# EAGLE board vcf (EAGLE 7.2.0)
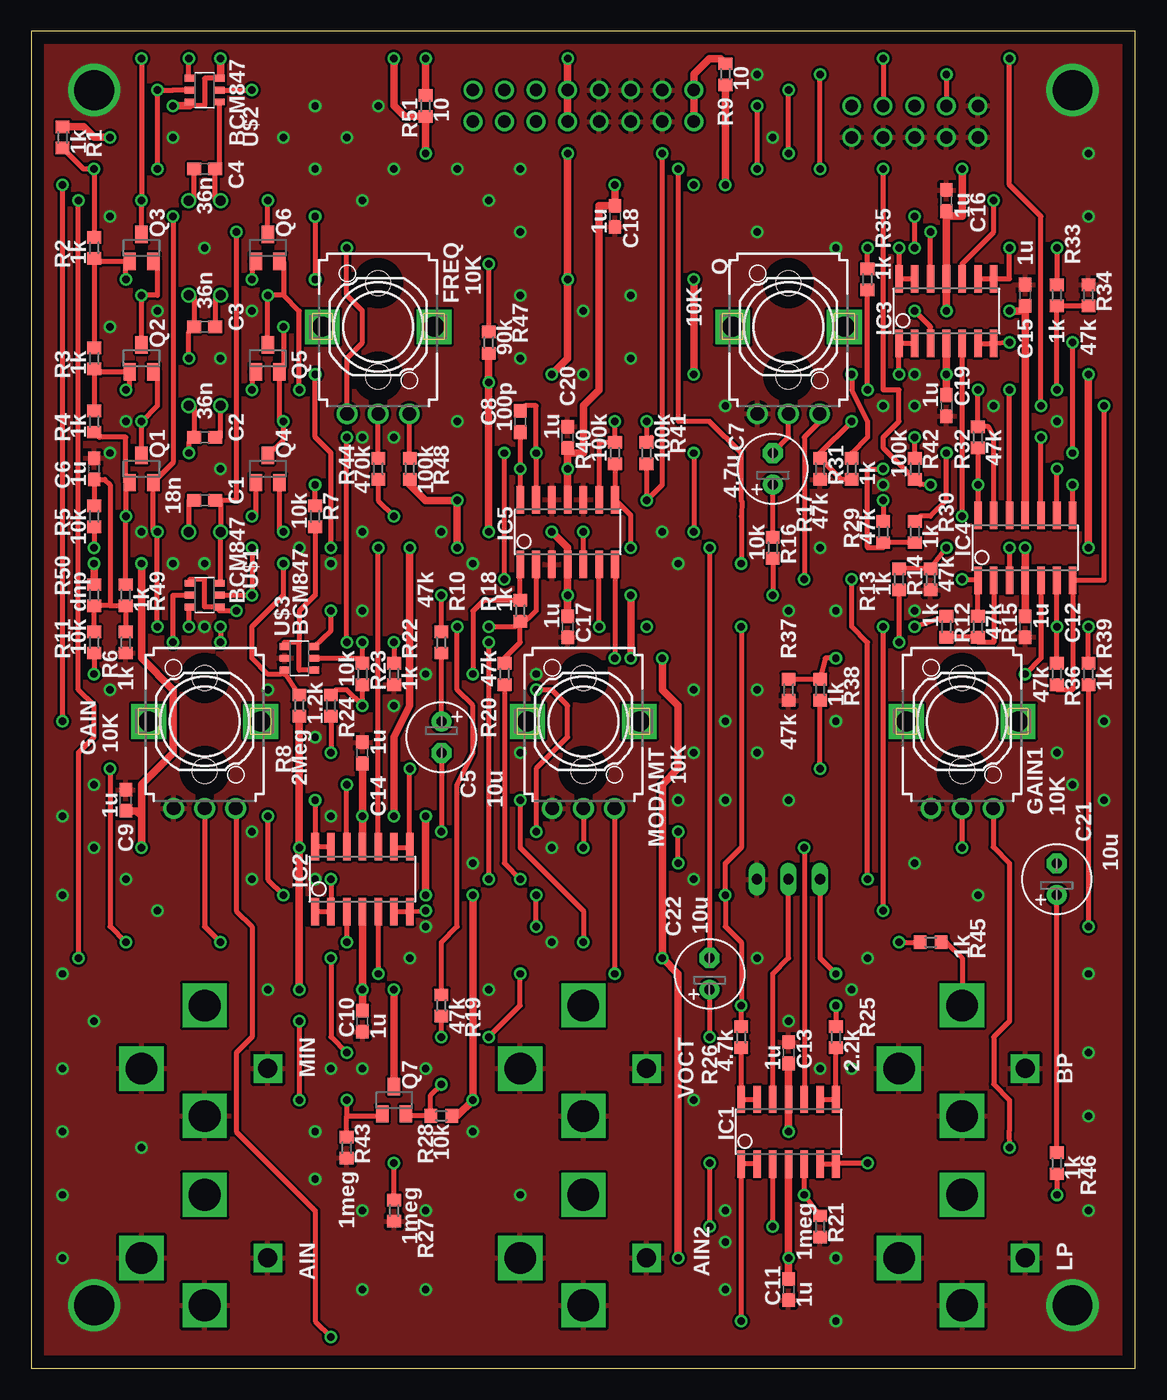
[diagram p0: board, top side]
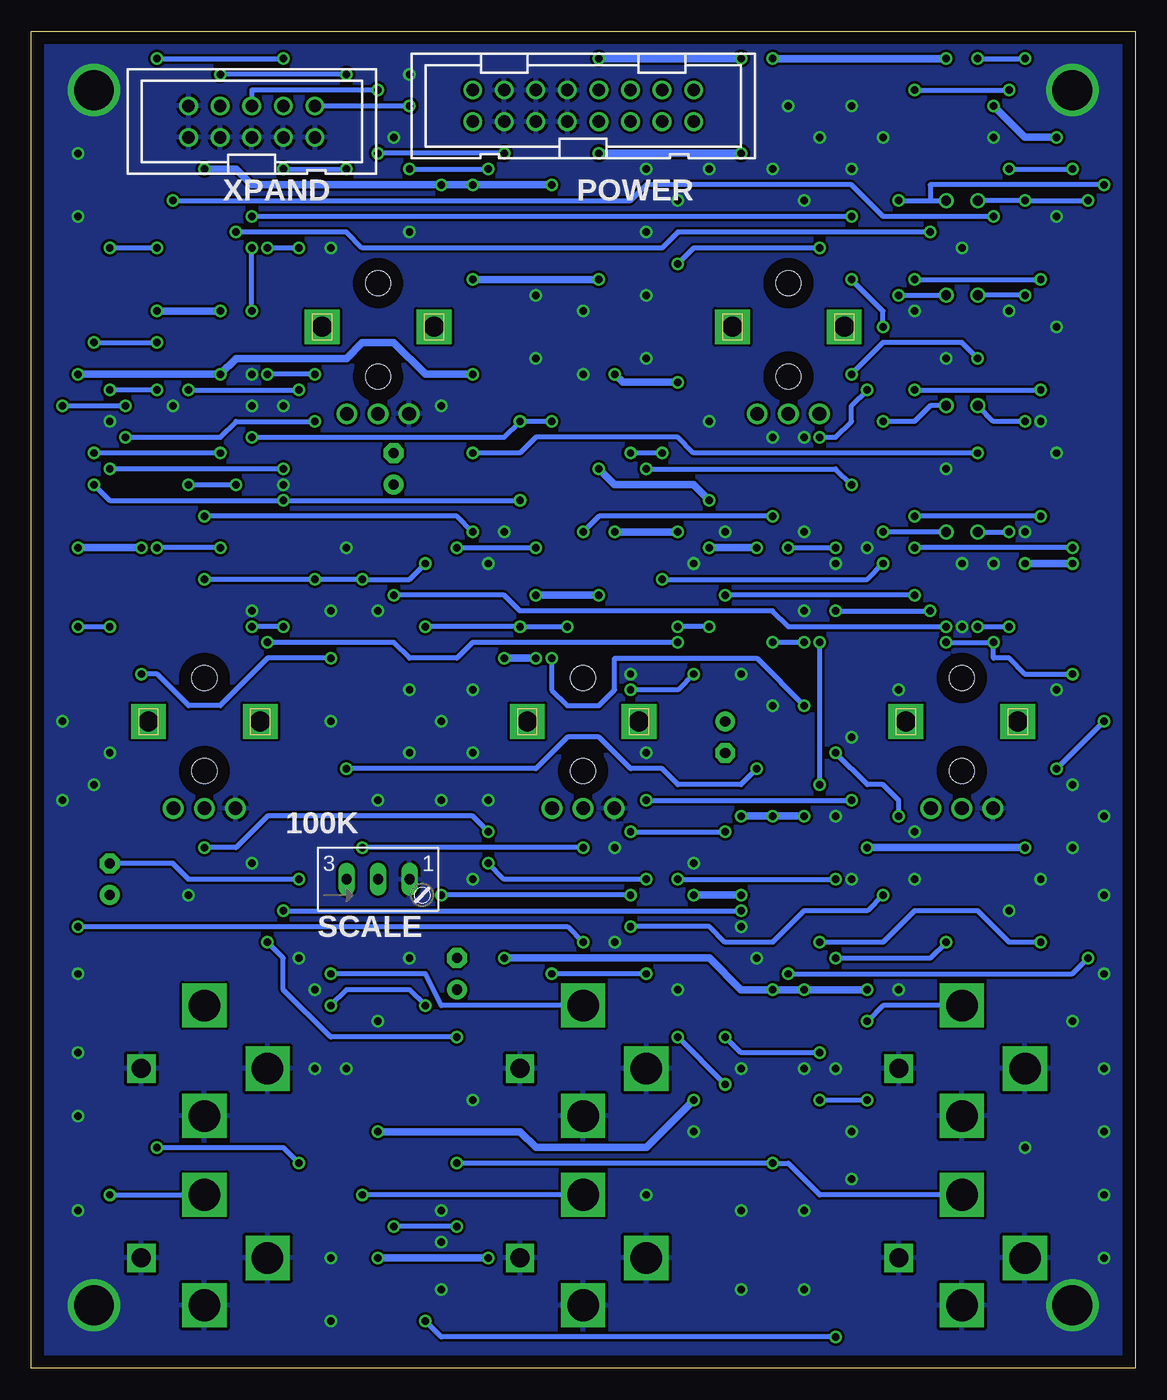
[diagram p1: board, bottom side, seen from below]

Size 88.88 x 107.62 mm. Coordinates in mm from the lower left corner, seen from the top.
Outline: 0,0 88.88,0 88.88,107.62 0,107.62 0,0
Copper layers (1*16): Top 0.035mm / dielectric 1.5mm / Bottom 0.035mm
Design rules "default *": minimum track width 10mil, minimum drill 20mil, track to track 8mil, track to pad 8mil, pad to pad 8mil, via to via 8mil, smd to smd 8mil, copper to edge 40mil, drill to drill 8mil, minimum pad ring 10mil, minimum via ring 8mil, stop-mask expansion 4mil, vias tented up to drill 0mil, thermal gap 10mil

## Footprints (pad centres in the part's own frame; a part is rotated, then mirrored left to right if it is on the bottom)
PJ301BM = drill 1.524 square: P$1 5.08,0 | drill 2.54 square: P$2 0,-3.81; P$3 0,5.08; P$4 -5.08,0
C0603 = smd 1.1 x 1: 1 -0.85,0; 2 0.85,0
E2,5-6 = drill 0.813 pad 1.6: + -1.27,0 | drill 0.813 pad 1.6 octagon: - 1.27,0
EVUFXJ = drill 1.1 pad 1.676: 1 -2.5,-7; 2 0,-7; 3 2.5,-7 | drill 1.6 pad 2.8 square: M1 4.5,0; M2 -4.5,0 | hole 2: 0,3.5; 0,-4
SO14 = smd 0.61 x 2.21: 1 -3.81,-2.603; 2 -2.54,-2.603; 3 -1.27,-2.603; 4 0,-2.603; 5 1.27,-2.603; 6 2.54,-2.603; 7 3.81,-2.603; 8 3.81,2.603; 9 2.54,2.603; 10 1.27,2.603; 11 0,2.603; 12 -1.27,2.603; 13 -2.54,2.603; 14 -3.81,2.603
PAK100/2500-16 = drill 1 pad 1.422: 1 -8.89,-1.27; 2 -8.89,1.27; 3 -6.35,-1.27; 4 -6.35,1.27; 5 -3.81,-1.27; 6 -3.81,1.27; 7 -1.27,-1.27; 8 -1.27,1.27; 9 1.27,-1.27; 10 1.27,1.27; 11 3.81,-1.27; 12 3.81,1.27; 13 6.35,-1.27; 14 6.35,1.27; 15 8.89,-1.27; 16 8.89,1.27
SOT23 = smd 1 x 1.4: 1 -0.95,-1.1; 2 0.95,-1.1; 3 0,1.1
R0603 = smd 1 x 1.1: 1 -0.85,0; 2 0.85,0
S64W = drill 0.813 long: A 2.54,1.27; E -2.54,1.27; S 0,1.27
SOT457R_PHILIPS = smd 0.55 x 0.8: 1 -0.95,-1.2; 2 0,-1.2; 3 0.95,-1.2; 4 0.95,1.2; 5 0,1.2; 6 -0.95,1.2
PAK100/2500-10 = drill 1 pad 1.422: 1 -5.08,-1.27; 2 -5.08,1.27; 3 -2.54,-1.27; 4 -2.54,1.27; 5 0,-1.27; 6 0,1.27; 7 2.54,-1.27; 8 2.54,1.27; 9 5.08,-1.27; 10 5.08,1.27

## Placement (x,y rotation side)
AIN  PJ301BM  [PJ301BM]  13.97,8.89 0 top
AIN2  PJ301BM  [PJ301BM]  44.45,8.89 0 top
BP  PJ301BM  [PJ301BM]  74.93,24.13 0 top
C1  18n  [C0603]  13.97,69.85 0 top
C2  36n  [C0603]  13.97,74.93 0 top
C3  36n  [C0603]  13.97,83.82 0 top
C4  36n  [C0603]  13.97,96.52 0 top
C5  10u  [E2,5-6]  33.02,50.8 270 top
C6  1u  [C0603]  5.08,72.39 90 top
C7  4.7u  [E2,5-6]  59.69,72.39 90 top
C8  100p  [C0603]  39.37,76.2 270 top
C9  1u  [C0603]  7.62,45.72 90 top
C10  1u  [C0603]  26.67,27.94 270 top
C11  1u  [C0603]  60.96,6.35 270 top
C12  1u  [C0603]  80.01,59.69 270 top
C13  1u  [C0603]  60.96,25.4 90 top
C14  1u  [C0603]  26.67,49.53 90 top
C15  1u  [C0603]  80.01,86.36 90 top
C16  1u  [C0603]  73.66,93.98 90 top
C17  1u  [C0603]  43.18,59.69 270 top
C18  1u  [C0603]  46.99,92.71 270 top
C19  1u  [C0603]  73.66,77.47 270 top
C20  1u  [C0603]  43.18,74.93 90 top
C21  10u  [E2,5-6]  82.55,39.37 90 top
C22  10u  [E2,5-6]  54.61,31.75 90 top
FREQ  10K  [EVUFXJ]  27.94,83.82 0 top
GAIN  10K  [EVUFXJ]  13.97,52.07 0 top
GAIN1  10K  [EVUFXJ]  74.93,52.07 0 top
IC1  OPA4130U  [SO14]  60.96,19.05 0 top
IC2  OPA4130U  [SO14]  26.67,39.37 0 top
IC3  OPA4130U  [SO14]  73.66,85.09 0 top
IC4  OPA4130U  [SO14]  80.01,66.04 0 top
IC5  OPA4130U  [SO14]  43.18,67.31 0 top
LP  PJ301BM  [PJ301BM]  74.93,8.89 0 top
MIN  PJ301BM  [PJ301BM]  13.97,24.13 0 top
MODAMT  10K  [EVUFXJ]  44.45,52.07 0 top
POWER  2516-  [PAK100/2500-16]  44.45,101.6 0 bottom
Q  10K  [EVUFXJ]  60.96,83.82 0 top
Q1  BC847ASMD  [SOT23]  8.89,72.39 0 top
Q2  BC847ASMD  [SOT23]  8.89,81.28 0 top
Q3  BC847ASMD  [SOT23]  8.89,90.17 0 top
Q4  BC847ASMD  [SOT23]  19.05,72.39 0 top
Q5  BC847ASMD  [SOT23]  19.05,81.28 0 top
Q6  BC847ASMD  [SOT23]  19.05,90.17 0 top
Q7  BC847ASMD  [SOT23]  29.21,21.59 0 top
R1  1k  [R0603]  2.54,99.06 90 top
R2  1k  [R0603]  5.08,90.17 90 top
R3  1k  [R0603]  5.08,81.28 90 top
R4  1k  [R0603]  5.08,76.2 90 top
R5  10k  [R0603]  5.08,68.58 90 top
R6  1k  [R0603]  7.62,58.42 90 top
R7  10k  [R0603]  22.86,68.58 270 top
R8  2Meg  [R0603]  21.59,53.34 270 top
R9  10  [R0603]  55.88,104.14 90 top
R10  47k  [R0603]  33.02,58.42 90 top
R11  10k  [R0603]  5.08,58.42 90 top
R12  1k  [R0603]  73.66,59.69 270 top
R13  1k  [R0603]  69.85,63.5 90 top
R14  47k  [R0603]  72.39,63.5 270 top
R15  47k  [R0603]  76.2,59.69 270 top
R16  10k  [R0603]  59.69,66.04 90 top
R17  47k  [R0603]  63.5,72.39 270 top
R18  1k  [R0603]  39.37,60.96 90 top
R19  47k  [R0603]  33.02,29.21 90 top
R20  47k  [R0603]  38.1,55.88 90 top
R21  1meg  [R0603]  63.5,11.43 90 top
R22  1k  [R0603]  29.21,55.88 90 top
R23  10k  [R0603]  26.67,55.88 90 top
R24  1.2k  [R0603]  24.13,53.34 90 top
R25  2.2k  [R0603]  64.77,26.67 90 top
R26  4.7k  [R0603]  57.15,26.67 90 top
R27  1meg  [R0603]  29.21,12.7 90 top
R28  10k  [R0603]  33.02,20.32 180 top
R29  47k  [R0603]  68.58,67.31 270 top
R30  1k  [R0603]  71.12,67.31 90 top
R31  1k  [R0603]  66.04,72.39 90 top
R32  47k  [R0603]  76.2,74.93 90 top
R33  1k  [R0603]  82.55,86.36 90 top
R34  47k  [R0603]  85.09,86.36 90 top
R35  1k  [R0603]  67.31,87.63 90 top
R36  47k  [R0603]  82.55,55.88 90 top
R37  47k  [R0603]  60.96,54.61 90 top
R38  1k  [R0603]  63.5,54.61 270 top
R39  1k  [R0603]  85.09,55.88 270 top
R40  100k  [R0603]  46.99,73.66 90 top
R41  100k  [R0603]  49.53,73.66 270 top
R42  100k  [R0603]  71.12,72.39 270 top
R43  1meg  [R0603]  25.4,17.78 90 top
R44  470k  [R0603]  27.94,72.39 270 top
R45  1k  [R0603]  72.39,34.29 180 top
R46  1k  [R0603]  82.55,16.51 90 top
R47  90k  [R0603]  36.83,82.55 270 top
R48  100k  [R0603]  30.48,72.39 90 top
R49  1k  [R0603]  7.62,62.23 90 top
R50  dnp  [R0603]  5.08,62.23 270 top
R51  10  [R0603]  31.75,101.6 90 top
SCALE  100K  [S64W]  60.96,38.1 0 bottom
U$1  BCM847  [SOT457R_PHILIPS]  13.97,62.23 90 top
U$2  BCM847  [SOT457R_PHILIPS]  13.97,102.87 270 top
U$3  BCM847  [SOT457R_PHILIPS]  21.59,57.15 90 top
VPEROCT  PJ301BM  [PJ301BM]  44.45,24.13 0 top
XPAND  2510-  [PAK100/2500-10]  71.12,100.33 0 bottom

## Library data of the parts
AIN AIN2 BP C1-C22 FREQ GAIN GAIN1 LP MIN MODAMT Q Q1-Q7 R1-R51 SCALE U$1-U$3 VPEROCT = dan
IC1-IC5 = dan; MF: TEXAS INSTRUMENTS; MPN: OPA4130UA; OC_FARNELL: 1648707; OC_NEWARK: 80K8080
POWER = dan; OC_FARNELL: unknown; OC_NEWARK: unknown
XPAND = dan; MF: 3M; MPN: 2510-6002UB; OC_FARNELL: 9838244; OC_NEWARK: 46F4725

## Nets
+12V: C9.1 C10.1 C11.1 C12.1 C17.1 C19.1 IC1.4 IC2.4 IC3.4 IC4.4 IC5.4 Q7.3 R1.2 R8.2 R47.2 R50.1 R51.1 U$2.3 U$2.6
-12V: C13.1 C14.1 C15.1 C16.1 C18.1 C20.1 IC1.11 IC2.11 IC3.11 IC4.11 IC5.11 R9.1 R28.1 R48.1
GND: AIN2.P$1 AIN2.P$2 AIN2.P$4 AIN.P$1 AIN.P$2 AIN.P$4 BP.P$1 BP.P$2 BP.P$4 C6.2 C9.2 C10.2 C11.2 C12.2 C13.2 C14.2 C15.2 C16.2 C17.2 C18.2 C19.2 C20.2 GAIN1.1 GAIN.1 IC5.3 IC5.10 IC5.12 LP.P$1 LP.P$2 LP.P$4 MIN.P$1 MIN.P$2 MIN.P$4 MODAMT.1 POWER.3 POWER.4 POWER.5 POWER.6 POWER.7 POWER.8 Q.1 R6.1 R14.2 R17.2 R21.1 R22.1 R27.1 R34.2 R37.1 R43.1 SCALE.A U$3.5 VPEROCT.P$1 VPEROCT.P$2 VPEROCT.P$4 XPAND.1 XPAND.2 XPAND.3 XPAND.5 XPAND.7 XPAND.9
N$1: U$1.1 U$1.4 U$3.3
N$2: C1.1 IC3.10 Q1.2 U$1.6
N$3: C2.1 IC3.5 Q1.3 Q2.2
N$4: C3.1 IC2.10 Q2.3 Q3.2
N$5: C3.2 IC2.12 Q5.3 Q6.2
N$6: C2.2 IC3.3 Q4.3 Q5.2
N$7: C1.2 IC3.12 Q4.2 U$1.3
N$8: C4.2 IC2.3 Q6.3 U$2.4
N$9: C4.1 IC2.5 Q3.3 U$2.1
N$10: R1.1 R2.2 U$2.2 U$2.5
N$11: Q3.1 Q6.1 R2.1 R3.2
N$12: Q2.1 Q5.1 R3.1 R4.2
N$13: Q1.1 Q4.1 R4.1 R49.2
N$14: R5.1 R10.2 U$1.2
N$15: IC5.2 R18.1 R19.2 R20.2
N$16: R7.2 U$3.1 U$3.4
N$17: C8.2 IC5.14 R7.1
N$18: MIN.P$3 Q7.1 R43.2
N$19: C8.1 IC5.13 R8.1 U$3.6
N$20: C5.- IC5.1 R18.2
N$21: C5.+ R10.1
N$22: R11.1 R16.1 U$1.5
N$23: IC2.1 IC2.2 R13.1
N$24: IC5.5 R44.2
N$25: IC4.2 R12.2 R15.2
N$26: IC4.3 R13.2 R14.1
N$27: C21.- IC4.1 Q.3 R15.1 XPAND.10
N$28: IC2.8 IC2.9 R38.2
N$29: IC1.8 IC1.9 R25.1
N$30: GAIN1.3 IC1.6 IC1.7
N$31: C7.+ R16.2
N$32: C7.- Q.2
N$33: MODAMT.3 Q7.2 R28.2
N$34: R22.2 R23.2 U$3.2
N$35: IC2.6 IC2.7 R12.1
N$36: IC5.6 R24.1 R25.2 R26.2
N$37: IC3.1 IC3.2 R31.2
N$38: IC1.13 IC1.14 R26.1
N$39: IC3.8 IC3.9 R33.2
N$40: SCALE.E VPEROCT.P$3
N$41: IC1.12 SCALE.S
N$42: IC2.13 IC2.14 R39.2
N$43: GAIN.2 R19.1
N$44: IC3.6 IC3.7 R30.2
N$45: IC4.10 R17.1 R31.1
N$46: IC4.9 R29.2 R30.1
N$47: IC4.8 R29.1 R41.2 XPAND.6
N$48: IC3.13 IC3.14 R35.2
N$49: BP.P$3 R45.1
N$50: IC1.10 MODAMT.2
N$51: IC4.13 R32.2 R35.1
N$52: IC4.14 R32.1 R42.2 XPAND.4
N$53: IC5.7 R23.1 R24.2
N$54: IC4.12 R33.1 R34.1
N$55: IC4.5 R37.2 R38.1
N$56: IC4.6 R36.2 R39.1
N$57: GAIN1.2 R20.1
N$58: IC4.7 R36.1 XPAND.8
N$59: IC5.9 R40.2 R41.1 R42.1
N$60: FREQ.1 R47.1
N$61: C22.- IC5.8 R40.1
N$62: AIN.P$3 IC1.3 R27.2
N$63: C21.+ R46.2
N$64: LP.P$3 R46.1
N$65: FREQ.2 R44.1
N$66: FREQ.3 R48.2
N$67: GAIN.3 IC1.1 IC1.2
N$68: C6.1 R5.2 R6.2 R11.2 R49.1 R50.2
N$69: AIN2.P$3 IC1.5 R21.2
N$70: C22.+ R45.2
N$71: POWER.9 POWER.10 R51.2
N$72: POWER.1 POWER.2 R9.2

## Tracks (layer width: path | path; a pad name or v marks a point on that pad's centre or on a via)
+12V  (via drill 0.6)
  Top 0.406: U$2.3 12.77,101.6 13.97,101.6 13.97,103.82 U$2.6 15.24,103.82 | 21.59,43.6 21.59,43.18
  Top 0.61: v11.43,101.6 12.77,101.6 | 15.24,103.82 v15.24,105.41 | C11.1 v60.96,8.89 IC1.4 | C17.1 v43.18,62.23 IC5.4 43.18,66.04 v41.91,67.31 | C12.1 IC4.4 v80.01,66.04 | IC3.4 v73.66,80.01 C19.1 | C10.1 v26.67,30.48 IC2.4 | v41.91,80.01 43.18,81.28 v43.18,87.63 v43.18,97.79 | v85.09,66.04 v85.09,80.01 | v48.26,57.15 v48.26,62.23 | v52.07,8.89 52.07,31.75 v50.8,33.02 50.8,46.99 52.07,48.26 52.07,53.34 50.8,54.61 v50.8,57.15 | v36.83,67.31 v36.83,79.36 R47.2 | v53.34,80.01 v53.34,87.63 | R1.2 4.23,99.91 5.08,99.06 v6.35,99.06 | R8.2 21.59,43.18 v21.59,41.91 v21.59,30.48 | R50.1 v5.08,64.77 | v8.89,64.77 8.89,57.15 11.43,54.61 11.43,49.53 8.89,46.99 8.89,44.45 | 8.89,44.45 v8.89,41.91 | Q7.3 v29.21,30.48 | C9.1 8.47,44.87 8.89,44.45 | v31.75,97.79 R51.1 30.06,100.75 29.21,101.6 v29.21,105.41
  Bottom 0.61: v15.24,105.41 v29.21,105.41 | v36.83,79.36 41.26,79.36 v41.91,80.01 | v41.91,67.31 v36.83,67.31 | v80.01,66.04 v85.09,66.04 | v85.09,80.01 v73.66,80.01 72.39,81.28 63.5,81.28 62.23,82.55 59.69,82.55 57.15,80.01 v53.34,80.01 | v53.34,87.63 v43.18,87.63 | v50.8,57.15 v48.26,57.15 | v48.26,62.23 v43.18,62.23 | v60.96,8.89 v52.07,8.89 | v6.35,99.06 8.89,99.06 v11.43,101.6 | v21.59,30.48 v26.67,30.48 v29.21,30.48 31.75,30.48 34.29,33.02 v50.8,33.02 | v5.08,64.77 v8.89,64.77 | v8.89,41.91 v21.59,41.91 | v43.18,97.79 v31.75,97.79
-12V  (via drill 0.6)
  Top 0.406: IC1.11 C13.1 | 43.18,73.66 C20.1 | 79.59,85.09 C15.1 | 74.08,92.71 C16.1 | R48.1 30.48,71.12
  Top 0.61: IC5.11 v43.18,72.39 C20.1 | C16.1 IC3.11 v73.66,85.09 | IC4.11 C15.1 | IC2.11 v26.67,44.45 C14.1 | v46.99,95.25 C18.1 45.72,93.56 45.72,78.74 44.45,77.47 44.45,73.66 43.18,73.66 | C13.1 v60.96,19.05 | v78.74,85.09 79.59,85.09 | v74.93,96.52 74.93,92.71 74.08,92.71 | v31.75,44.45 v31.75,38.1 | v29.21,44.45 29.21,50.8 30.48,53.34 v30.48,66.04 | v34.29,66.04 v34.29,69.85 31.75,69.85 30.48,71.12 | v35.56,38.1 v35.56,21.59 34.29,20.32 R28.1 | R9.1 v55.88,95.25
  Bottom 0.61: v46.99,95.25 v53.34,95.25 v55.88,95.25 58.42,95.25 71.12,95.25 72.39,96.52 v74.93,96.52 | v60.96,19.05 49.53,19.05 48.26,17.78 39.37,17.78 v35.56,21.59 | v43.18,72.39 41.91,71.12 35.56,71.12 v34.29,69.85 | v73.66,85.09 v78.74,85.09 | v26.67,44.45 v29.21,44.45 v31.75,44.45 | v31.75,38.1 v35.56,38.1 | v30.48,66.04 v34.29,66.04
GND  (via drill 0.6, 3.2)
  other vias: 7.62,76.2 6.35,83.82 24.13,44.45 19.05,54.61 21.59,66.04 13.97,59.69 17.78,43.18 11.43,99.06 10.16,85.09 15.24,81.28 15.24,72.39 11.43,64.77 53.34,39.37 31.75,35.56 36.83,30.48 26.67,24.13 82.55,76.2 22.86,39.37 24.13,24.13 26.67,60.96 77.47,77.47 17.78,85.09 20.32,99.06 25.4,99.06 22.86,96.52 59.69,99.06 85.09,92.71 85.09,97.79 58.42,104.14 22.86,101.6 27.94,101.6 71.12,80.01 26.67,6.35 31.75,6.35 31.75,24.13 31.75,12.7 64.77,3.81 66.04,30.48 58.42,33.02 64.77,52.07 58.42,49.53 58.42,54.61 63.5,66.04 48.26,81.28 39.37,81.28 48.26,86.36 39.37,86.36 39.37,96.52 29.21,96.52 30.48,33.02 17.78,39.37 55.88,6.35 64.77,8.89 71.12,60.96 7.62,39.37 83.82,46.99 85.09,31.75 2.54,31.75 2.54,24.13 2.54,19.05 2.54,13.97 2.54,8.89 85.09,25.4 85.09,20.32 85.09,12.7 39.37,13.97 34.29,96.52 10.16,36.83 82.55,49.53 86.36,52.07 86.36,45.72 2.54,44.45 2.54,38.1 5.08,5.08 83.82,5.08 83.82,102.87 5.08,102.87 19.05,30.48 22.86,19.05 8.89,17.78 22.86,15.24 5.08,27.94 29.21,53.34 40.64,55.88 26.67,12.7 5.08,41.91 5.08,46.99 44.45,85.09 44.45,80.01 55.88,77.47 64.77,90.17 26.67,74.93 68.58,71.12 26.67,67.31 71.12,77.47 39.37,49.53 55.88,45.72 67.31,33.02 60.96,27.94 63.5,24.13 66.04,24.13 33.02,67.31 35.56,64.77 29.21,74.93 24.13,64.77 6.35,73.66 35.56,40.64 35.56,19.05 8.89,67.31 6.35,54.61 71.12,40.64 60.96,45.72 52.07,45.72 41.91,41.91 31.75,55.88 13.97,64.77 13.97,90.17 60.96,60.96 64.77,60.96 26.67,93.98 36.83,93.98 39.37,91.44 58.42,91.44 6.35,92.71 53.34,54.61 53.34,49.53 55.88,52.07 55.88,10.16 55.88,12.7 34.29,76.2 53.34,21.59 41.91,34.29 22.86,50.8 52.07,64.77 50.8,67.31 68.58,77.47 76.2,38.1
  pour Top: -6.35,110.49 90.17,110.49 90.17,-1.27 -5.08,-1.27
  pour Bottom: -5.08,109.22 90.17,109.22 90.17,-2.54 -3.81,-3.81
N$1  (via drill 0.6)
  Top 0.406: U$1.4 12.77,63.5 13.97,63.5 13.97,61.28 U$1.1 15.17,60.96 v16.51,60.96 | U$3.3 24.13,59.37 v24.13,60.96
  Bottom 0.406: v24.13,60.96 v16.51,60.96
N$2  (via drill 0.6, 0.8)
  Top 0.406: C1.1 12.7,69.85 v12.7,67.31 | U$1.6 12.7,61.28 v12.7,59.69 | v10.16,59.69 v10.16,67.31 9.84,67.31 Q1.2 11.43,72.88 v11.43,92.71 | 74.93,87.63 IC3.10 74.93,88.9 77.47,91.44 v77.47,93.98
  Bottom 0.406: v12.7,67.31 v10.16,67.31 | v12.7,59.69 v10.16,59.69 | v77.47,93.98 40.64,93.98 39.37,95.25 22.86,95.25 20.32,92.71 v11.43,92.71
N$3  (via drill 0.6, 0.8)
  Top 0.406: Q1.3 v8.89,76.2 10.16,77.47 10.16,80.18 Q2.2 | v12.7,77.47 13.12,77.47 C2.1 12.7,74.51 v12.7,73.66 | v53.34,73.66 v53.34,67.31 | v74.93,68.58 IC3.5
  Bottom 0.406: v8.89,76.2 11.43,76.2 v12.7,77.47 | v12.7,73.66 35.56,73.66 36.83,74.93 48.26,74.93 49.53,73.66 v53.34,73.66 | v53.34,67.31 54.61,68.58 v74.93,68.58
N$4  (via drill 0.6, 0.8)
  Top 0.406: Q2.3 v8.89,86.36 10.16,86.36 10.16,89.07 Q3.2 | v12.7,86.36 13.12,86.36 C3.1 12.7,83.4 v12.7,81.28 | v24.13,66.04 24.13,73.66 22.86,74.93 v22.86,80.01 | IC2.10 v27.94,66.04
  Bottom 0.406: v8.89,86.36 v12.7,86.36 | v27.94,66.04 v24.13,66.04 | v12.7,81.28 13.97,82.55 20.32,82.55 v22.86,80.01
N$5  (via drill 0.6, 0.8)
  Top 0.406: Q5.3 v19.05,86.36 20.32,86.36 | v15.24,86.36 14.82,86.36 C3.2 | Q6.2 20.32,89.07 20.32,86.36 | v21.59,78.74 21.59,85.09 20.32,86.36 | IC2.12 v25.4,46.99 | v25.4,58.42 v25.4,74.93
  Bottom 0.406: v19.05,86.36 v15.24,86.36 | v25.4,46.99 v25.4,58.42 | v25.4,74.93 24.13,74.93 22.86,76.2 22.86,77.47 v21.59,78.74
N$6  (via drill 0.6, 0.8)
  Top 0.406: C2.2 15.24,74.93 v15.24,77.47 | Q4.3 20.32,74.76 v20.32,76.2 20,76.2 Q5.2 20.32,80.5 v20.32,83.82 | IC3.3 72.39,83.82 v71.12,85.09 | v71.12,90.17 v71.12,92.71 | v22.86,92.71 v22.86,87.63
  Bottom 0.406: v71.12,85.09 v71.12,90.17 | v20.32,83.82 20.32,85.09 v22.86,87.63 | v15.24,77.47 16.51,77.47 17.78,76.2 v20.32,76.2 | v71.12,92.71 v22.86,92.71
N$7  (via drill 0.6, 0.8)
  Top 0.406: v20.32,67.31 20,67.31 Q4.2 | U$1.3 15.24,63.18 v15.24,67.31 15.24,69.85 C1.2 16.51,69.85 v16.51,91.44 | IC3.12 v72.39,91.44
  Bottom 0.406: v15.24,67.31 v20.32,67.31 | v16.51,91.44 36.83,91.44 38.1,90.17 62.23,90.17 63.5,91.44 v72.39,91.44
N$8  (via drill 0.6, 0.8)
  Top 0.406: Q6.3 v19.05,93.98 | v15.24,93.98 14.82,93.98 C4.2 15.17,96.52 U$2.4 | IC2.3 v25.4,34.29 | v2.54,52.07 v2.54,95.25 | v6.35,48.26 6.35,35.56 v7.62,34.29
  Bottom 0.406: v19.05,93.98 16.51,93.98 | 16.51,93.98 v15.24,93.98 | v2.54,95.25 16.51,95.25 16.51,93.98 | v7.62,34.29 10.16,34.29 12.7,36.83 17.78,36.83 20.32,34.29 v25.4,34.29 | v2.54,52.07 v6.35,48.26
N$9  (via drill 0.6, 0.8)
  Top 0.406: v12.7,93.98 13.12,93.98 C4.1 | U$2.1 12.7,103.82 v12.7,105.41 | v8.89,105.41 v8.89,93.98 Q3.3 | 27.94,36.83 IC2.5 v27.94,31.75 | v3.81,93.98 3.81,54.61 5.08,53.34 5.08,50.8 3.81,49.53 v3.81,33.02
  Bottom 0.406: v12.7,93.98 v8.89,93.98 v3.81,93.98 | v12.7,105.41 v8.89,105.41 | v27.94,31.75 5.08,31.75 v3.81,33.02
N$10  (via drill 0.6)
  Top 0.406: R2.2 v5.08,96.52 4.23,96.52 R1.1 | U$2.2 11.43,102.87 v10.16,102.87 v10.16,96.52 | U$2.5 v17.78,102.87
  Bottom 0.406: v10.16,96.52 v5.08,96.52 | v17.78,102.87 v10.16,102.87
N$11  (via drill 0.6)
  Top 0.406: R3.2 R2.1 5.08,89.07 Q3.1 7.94,88.9 7.62,88.9 v7.62,87.63 | Q6.1 17.78,89.07 v17.78,87.63
  Bottom 0.406: v17.78,87.63 v7.62,87.63
N$12  (via drill 0.6)
  Top 0.406: 5.08,80.18 R4.2 | 5.08,80.18 Q2.1 7.94,78.74 v7.62,78.74 | 5.08,80.18 R3.1 | Q5.1 17.78,80.18 v17.78,78.74
  Bottom 0.406: v17.78,78.74 v7.62,78.74
N$13  (via drill 0.6)
  Top 0.406: Q1.1 7.62,71.29 | 7.62,71.29 v7.62,68.58 R49.2 | Q4.1 18.1,68.58 v17.78,68.58 | 7.62,71.29 7.62,74.93 5.5,74.93 R4.1
  Bottom 0.406: v7.62,68.58 v17.78,68.58
N$14  (via drill 0.6)
  Top 0.406: U$1.2 v17.78,62.23 v17.78,66.04 | R5.1 v5.08,66.04 | R10.2 v33.02,62.23
  Bottom 0.406: v17.78,62.23 v33.02,62.23 | v5.08,66.04 v17.78,66.04
N$15  (via drill 0.6)
  Top 0.406: IC5.2 40.64,60.96 39.37,59.69 | v34.29,59.69 34.29,54.61 35.56,53.34 35.56,49.53 34.29,46.99 34.29,35.56 33.02,34.29 R19.2 | v36.83,59.69 38.95,59.69 R18.1 39.37,59.69 | R20.2 38.1,57.15 39.37,58.42 39.37,59.69
  Bottom 0.406: v34.29,59.69 v36.83,59.69
N$16
  Top 0.406: U$3.1 21.59,56.2 21.59,58.42 | 21.59,58.42 20.39,58.42 U$3.4 | R7.2 22.86,62.23 21.59,60.96 21.59,58.42
N$17  (via drill 0.6)
  Top 0.406: R7.1 v22.86,71.12 | IC5.14 v39.37,72.39 C8.2
  Bottom 0.406: v39.37,72.39 24.13,72.39 v22.86,71.12
N$18  (via drill 0.6)
  Top 0.406: R43.2 25.4,20.32 | 25.4,20.32 28.09,20.32 Q7.1 | v21.59,27.94 v21.59,21.59 | v25.4,21.59 25.4,20.32
  Bottom 0.406: MIN.P$3 20.32,29.21 v21.59,27.94 | v21.59,21.59 v25.4,21.59
N$19  (via drill 0.6)
  Top 0.406: C8.1 39.79,77.47 40.64,77.47 v40.64,73.66 IC5.13 | v38.1,63.5 v38.1,73.66 | U$3.6 20.39,55.88 20.07,55.88 | R8.1 20.32,56.13 U$3.6 | 20.07,55.88 19.05,55.88 17.78,57.15 17.78,59.69 20.32,62.23 v20.32,64.77 | 20.07,55.88 U$3.6
  Bottom 0.406: v38.1,73.66 v40.64,73.66 | v38.1,63.5 21.59,63.5 v20.32,64.77
N$20  (via drill 0.6)
  Top 0.406: IC5.1 R18.2 36.41,61.81 35.56,60.96 v35.56,55.88 | v40.64,43.18 40.64,48.26 43.18,50.8 43.18,53.34 41.91,54.61 v40.64,54.61 | C5.- v33.02,43.18
  Bottom 0.406: v35.56,55.88 36.83,54.61 v40.64,54.61 | v40.64,43.18 v33.02,43.18
N$21
  Top 0.406: C5.+ R10.1
N$22  (via drill 0.6)
  Top 0.406: v11.43,58.42 11.43,62.23 U$1.5 | R16.1 v59.69,62.23 | v15.24,59.69 v15.24,58.42 | R11.1 v5.08,55.88
  Bottom 0.406: v15.24,59.69 27.94,59.69 29.21,60.96 49.53,60.96 50.8,62.23 v59.69,62.23 | v15.24,58.42 v11.43,58.42 11.43,57.15 10.16,57.15 8.89,55.88 v5.08,55.88
N$23  (via drill 0.6)
  Top 0.406: IC2.1 IC2.2 v24.13,39.37 | R13.1 v69.85,58.42 | v36.83,58.42 v36.83,39.37
  Bottom 0.406: v36.83,39.37 v24.13,39.37 | v36.83,58.42 53.34,58.42 54.61,57.15 58.42,57.15 59.69,58.42 v69.85,58.42
N$24  (via drill 0.6)
  Top 0.406: IC5.5 v44.45,67.31 | R44.2 27.94,69.85 v29.21,68.58
  Bottom 0.406: v44.45,67.31 43.18,68.58 v29.21,68.58
N$25
  Top 0.406: IC4.2 77.47,58.42 76.2,58.42 R15.2 R12.2
N$26  (via drill 0.6)
  Top 0.406: v73.66,66.04 R14.1 R13.2 | v78.74,66.04 IC4.3
  Bottom 0.406: v73.66,66.04 v78.74,66.04
N$27  (via drill 0.6)
  Top 0.406: R15.1 IC4.1 76.14,63.5 v74.93,63.5 | v58.42,101.6 v58.42,96.52 | v52.07,96.52 52.07,76.2 54.61,76.2 57.15,73.66 57.15,69.81 57.19,69.81 57.15,68.58 v57.15,64.77 | v67.31,39.37 67.31,58.42 66.04,59.69 v66.04,63.5 | Q.3 63.46,76.16 62.23,74.93 v62.23,63.5
  Bottom 0.406: XPAND.10 v58.42,101.6 | v58.42,96.52 v52.07,96.52 | v74.93,63.5 v66.04,63.5 v62.23,63.5 58.42,63.5 v57.15,64.77 | v67.31,39.37 76.2,39.37 77.47,40.64 C21.-
N$28  (via drill 0.6)
  Top 0.406: IC2.9 29.21,41.91 30.48,41.91 IC2.8 v30.48,48.26 | v63.5,48.26 R38.2
  Bottom 0.406: v63.5,48.26 48.26,48.26 45.72,50.8 43.18,50.8 40.64,48.26 38.1,48.26 36.83,46.99 31.75,46.99 v30.48,48.26
N$29
  Top 0.406: IC1.9 IC1.8 R25.1
N$30  (via drill 0.6)
  Top 0.406: IC1.6 IC1.7 64.83,16.51 v67.31,16.51 | v78.74,17.78 78.7,19.09 78.74,19.13 78.74,21.59 77.47,22.86 77.47,26.67 78.74,27.94 78.74,40.64 77.43,41.95 GAIN1.3
  Bottom 0.406: v78.74,17.78 68.58,17.78 v67.31,16.51
N$31
  Top 0.406: R16.2 C7.+
N$32
  Top 0.406: C7.- 60.96,74.93 Q.2
N$33  (via drill 0.6)
  Top 0.406: Q7.2 30.33,20.32 R28.2 32.17,22.01 v33.02,22.86 | v36.83,26.67 39.37,29.21 v39.37,31.75 | v46.99,31.75 46.99,45.03 MODAMT.3
  Bottom 0.406: v33.02,22.86 v36.83,26.67 | v39.37,31.75 v46.99,31.75
N$34  (via drill 0.6)
  Top 0.406: U$3.2 26.67,57.15 R23.2 v26.67,58.42 | v29.21,58.42 R22.2
  Bottom 0.406: v26.67,58.42 v29.21,58.42
N$35  (via drill 0.6)
  Top 0.406: IC2.6 IC2.7 v31.75,36.83 | v68.58,36.83 v68.58,59.69 | v71.12,59.69 R12.1
  Bottom 0.406: v68.58,59.69 v71.12,59.69 | v68.58,36.83 v31.75,36.83
N$36  (via drill 0.6)
  Top 0.406: v45.72,59.69 IC5.6 | R26.2 v57.15,29.21 57.15,34.29 55.88,35.56 v55.88,38.1 55.88,40.64 57.15,41.91 v57.15,59.69 | v64.77,29.21 R25.2 | R24.1 v24.13,49.53 | v40.64,35.56 v40.64,38.1 | v19.05,44.45 19.05,39.37 v20.32,38.1
  Bottom 0.406: v45.72,59.69 v49.53,59.69 v57.15,59.69 | v57.15,29.21 58.42,30.48 63.5,30.48 v64.77,29.21 | v20.32,38.1 21.59,36.83 26.67,36.83 29.21,34.29 33.02,34.29 34.29,35.56 v40.64,35.56 | v40.64,38.1 v55.88,38.1 | v19.05,44.45 19.05,45.72 20.32,46.99 21.59,46.99 v24.13,49.53
N$37  (via drill 0.6)
  Top 0.406: IC3.2 IC3.1 v69.85,80.01 | v66.04,80.01 66.04,78.74 67.31,76.2 67.31,74.93 66.04,73.66 R31.2
  Bottom 0.406: v66.04,80.01 v69.85,80.01
N$38
  Top 0.406: IC1.13 IC1.14 R26.1
N$39  (via drill 0.6)
  Top 0.406: IC3.9 IC3.8 78.74,87.69 v78.74,90.17 | v82.55,90.17 R33.2
  Bottom 0.406: v78.74,90.17 v82.55,90.17
N$40  (via drill 0.6)
  Top 0.406: SCALE.E 63.5,33.02 v64.77,31.75
  Bottom 0.406: VPEROCT.P$3 55.88,29.21 57.15,31.75 v64.77,31.75
N$41
  Top 0.406: IC1.12 59.69,31.75 60.96,33.02 SCALE.S
N$42  (via drill 0.6)
  Top 0.406: IC2.13 IC2.14 v22.86,45.72 | R39.2 v85.09,35.56 | v39.37,45.72 39.37,41.91 44.45,36.83 v44.45,34.29
  Bottom 0.406: v39.37,45.72 v22.86,45.72 | v85.09,35.56 45.72,35.56 v44.45,34.29
N$43  (via drill 0.6)
  Top 0.406: 33.02,27.94 R19.1 v33.02,26.67 | GAIN.2 13.97,35.56 v15.24,34.29 | v24.13,33.02 24.13,26.67 v25.4,25.4
  Bottom 0.406: v25.4,25.4 31.75,25.4 v33.02,26.67 | v24.13,33.02 16.51,33.02 v15.24,34.29
N$44  (via drill 0.6)
  Top 0.406: IC3.6 IC3.7 v78.74,82.55 | v73.66,73.66 73.66,69.85 72.39,68.58 71.54,68.58 R30.2 | v83.82,73.66 v83.82,82.55
  Bottom 0.406: v73.66,73.66 v83.82,73.66 | v83.82,82.55 v78.74,82.55
N$45  (via drill 0.6)
  Top 0.406: IC4.10 v81.28,74.93 | R31.1 65.2,71.54 R17.1 63.5,73.66 v66.04,76.2
  Bottom 0.406: v81.28,74.93 73.66,74.93 72.39,76.2 v66.04,76.2
N$46  (via drill 0.6)
  Top 0.406: IC4.9 v82.55,72.39 | R30.1 R29.2 68.58,66.04 67.31,66.04 67.31,72.39 v68.58,72.39
  Bottom 0.406: v68.58,72.39 v82.55,72.39
N$47  (via drill 0.6)
  Top 0.406: R41.2 v49.53,69.85 50.8,71.12 v50.8,97.79 | v68.58,69.85 R29.1 | IC4.8 v83.82,71.12 | v60.96,97.79 v60.96,102.87
  Bottom 0.406: v83.82,71.12 82.55,69.85 v68.58,69.85 v49.53,69.85 | v50.8,97.79 v60.96,97.79 | v60.96,102.87 71.12,102.87 XPAND.6
N$48  (via drill 0.6)
  Top 0.406: IC3.13 IC3.14 v69.85,90.17 | R35.2 v67.31,90.17
  Bottom 0.406: v67.31,90.17 v69.85,90.17
N$49
  Top 0.406: R45.1 73.66,34.29 74.93,33.02 BP.P$3
N$50  (via drill 0.6)
  Top 0.406: MODAMT.2 v44.45,41.91 | v62.23,41.91 IC1.10
  Bottom 0.406: v44.45,41.91 v62.23,41.91
N$51  (via drill 0.6)
  Top 0.406: IC4.13 77.47,74.93 77.05,75.78 R32.2 v76.2,78.74 | v67.31,78.74 R35.1
  Bottom 0.406: v76.2,78.74 v67.31,78.74
N$52  (via drill 0.6)
  Top 0.406: v63.5,96.52 v63.5,104.14 | v73.66,104.14 XPAND.4 | IC4.14 v76.2,71.12 R32.1 | v72.39,71.12 71.54,71.12 R42.2 68.58,74.08 68.58,74.93 69.85,76.2 69.85,78.74 68.58,78.74 v68.58,96.52
  Bottom 0.406: v68.58,96.52 v63.5,96.52 | v63.5,104.14 v73.66,104.14 | v76.2,71.12 v72.39,71.12
N$53  (via drill 0.6)
  Top 0.406: IC5.7 v46.99,57.15 | R23.1 v26.67,53.34 25.4,54.61 24.55,54.61 R24.2
  Bottom 0.406: v26.67,53.34 30.48,57.15 41.91,57.15 41.91,54.61 43.18,53.34 45.72,53.34 46.99,54.61 v46.99,57.15
N$54  (via drill 0.6)
  Top 0.406: IC4.12 v78.74,78.74 | v82.55,78.74 R33.1 R34.1
  Bottom 0.406: v78.74,78.74 v82.55,78.74
N$55  (via drill 0.6)
  Top 0.406: R37.2 R38.1 63.92,57.15 v64.77,57.15 | IC4.5 81.28,57.15 v80.01,55.88
  Bottom 0.406: v64.77,57.15 69.85,57.15 73.66,53.34 76.2,53.34 78.74,55.88 v80.01,55.88
N$56  (via drill 0.6)
  Top 0.406: R36.2 v82.55,59.69 IC4.6 | R39.1 v85.09,59.69
  Bottom 0.406: v85.09,59.69 v82.55,59.69
N$57  (via drill 0.6)
  Top 0.406: R20.1 38.1,40.64 v39.37,39.37 | v52.07,40.64 v52.07,43.18 | v74.93,41.91 GAIN1.2
  Bottom 0.406: v39.37,39.37 50.8,39.37 v52.07,40.64 | v52.07,43.18 53.34,44.45 69.85,44.45 72.39,41.91 v74.93,41.91
N$58  (via drill 0.6)
  Top 0.406: R36.1 82.55,54.61 83.82,54.61 IC4.7 86.36,63.44 v86.36,77.47 | v68.58,105.41 XPAND.8 | v81.28,77.47 81.28,92.71 78.74,95.25 v78.74,105.41
  Bottom 0.406: v86.36,77.47 v81.28,77.47 | v78.74,105.41 v68.58,105.41
N$59  (via drill 0.6)
  Top 0.406: IC5.9 45.72,74.51 R40.2 v46.99,76.2 | R42.1 v71.12,74.93 | 49.95,74.93 R41.1 v49.53,76.2
  Bottom 0.406: v71.12,74.93 50.8,74.93 v49.53,76.2 v46.99,76.2
N$60  (via drill 0.6)
  Top 0.406: FREQ.1 25.44,81.32 26.67,82.55 26.67,85.09 25.4,86.36 v25.4,90.17 | v36.83,88.9 R47.1
  Bottom 0.406: v25.4,90.17 35.56,90.17 v36.83,88.9
N$61  (via drill 0.6)
  Top 0.406: R40.1 IC5.8 48.26,68.64 v48.26,66.04 | v54.61,66.04 C22.-
  Bottom 0.406: v54.61,66.04 v48.26,66.04
N$62  (via drill 0.6)
  Top 0.406: v54.61,16.51 v54.61,11.43 | v59.69,11.43 IC1.3 | R27.2 v29.21,16.51
  Bottom 0.406: AIN.P$3 25.4,13.97 27.94,16.51 v29.21,16.51 v54.61,16.51 | v54.61,11.43 v59.69,11.43
N$63
  Top 0.406: R46.2 C21.+
N$64  (via drill 0.6)
  Top 0.406: R46.1 v82.55,13.97
  Bottom 0.406: v82.55,13.97 LP.P$3
N$65
  Top 0.406: R44.1 FREQ.2
N$66
  Top 0.406: R48.2 30.48,76.78 FREQ.3
N$67  (via drill 0.6)
  Top 0.406: GAIN.3 16.51,45.03 16.51,36.83 17.78,35.56 17.78,26.67 16.51,25.4 16.51,19.05 22.86,12.7 22.86,3.81 v24.13,2.54 | IC1.2 IC1.1 v57.15,3.81
  Bottom 0.406: v24.13,2.54 55.88,2.54 v57.15,3.81
N$68
  Top 0.406: R6.2 R49.1 6.35,61.38 | R11.2 R50.2 6.35,61.38 | 6.35,61.38 6.35,71.12 5.93,71.54 C6.1 R5.2
N$69  (via drill 0.6)
  Top 0.406: IC1.5 v62.23,13.97 R21.2
  Bottom 0.406: AIN2.P$3 v62.23,13.97
N$70  (via drill 0.6)
  Top 0.406: C22.+ v54.61,26.67 | v69.85,34.29 R45.2
  Bottom 0.406: v54.61,26.67 64.77,26.67 68.58,30.48 68.58,33.02 v69.85,34.29
N$71  (via drill 0.6)
  Top 0.61: POWER.9 POWER.10 v43.18,105.41 | v31.75,105.41 R51.2
  Bottom 0.61: v43.18,105.41 v31.75,105.41
N$72
  Top 0.61: POWER.1 POWER.2 53.34,104.14 54.61,105.41 55.46,105.41 R9.2

## Text on the board
tPlace: MIN | VOCT | BP | AIN2 | AIN | LP